# Altium PCB preamp.PcbDoc
Units mm, origin at the board's own origin, x right, y up, seen from the top; angles counter-clockwise.
Board outline 150 x 50 mm, 2 copper layers (Top Layer, Bottom Layer); 61 components, 33 nets, 167 pads, 2 vias.
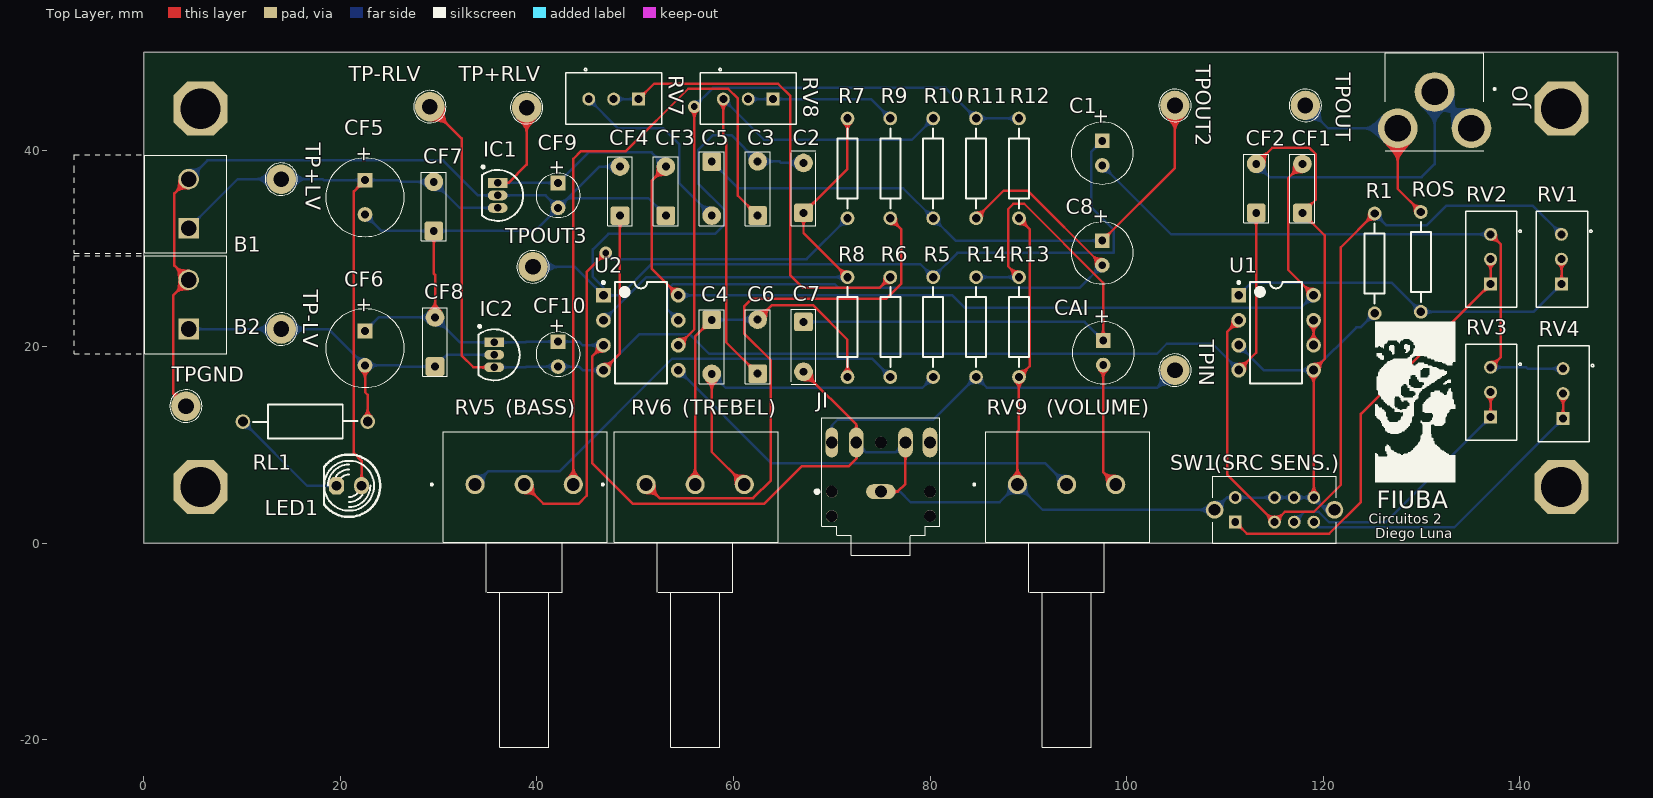
[diagram p0: Top Layer view]
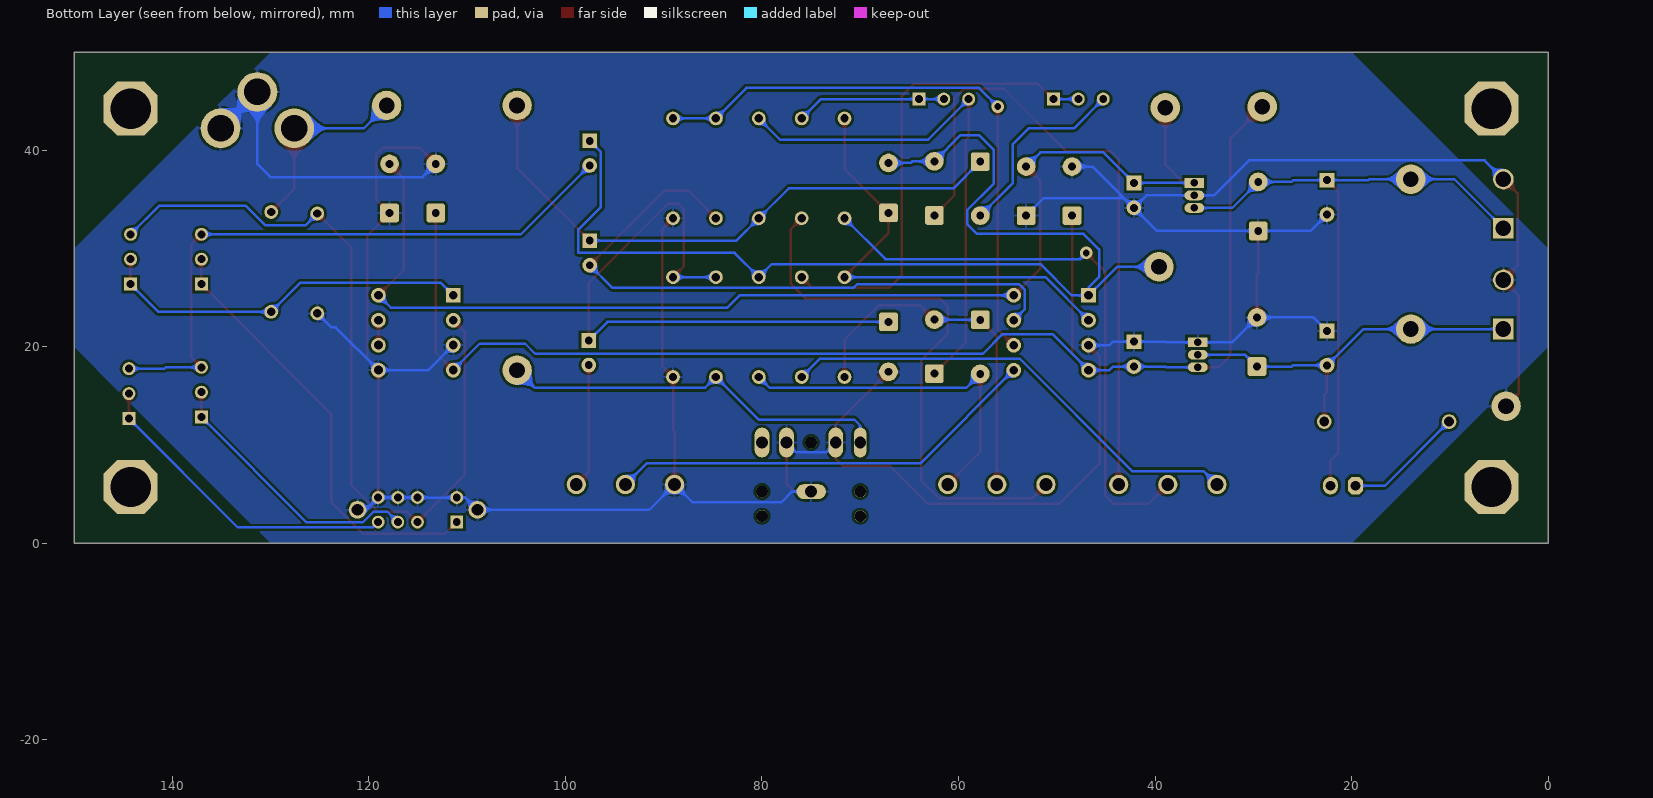
[diagram p1: Bottom Layer view, seen from below]
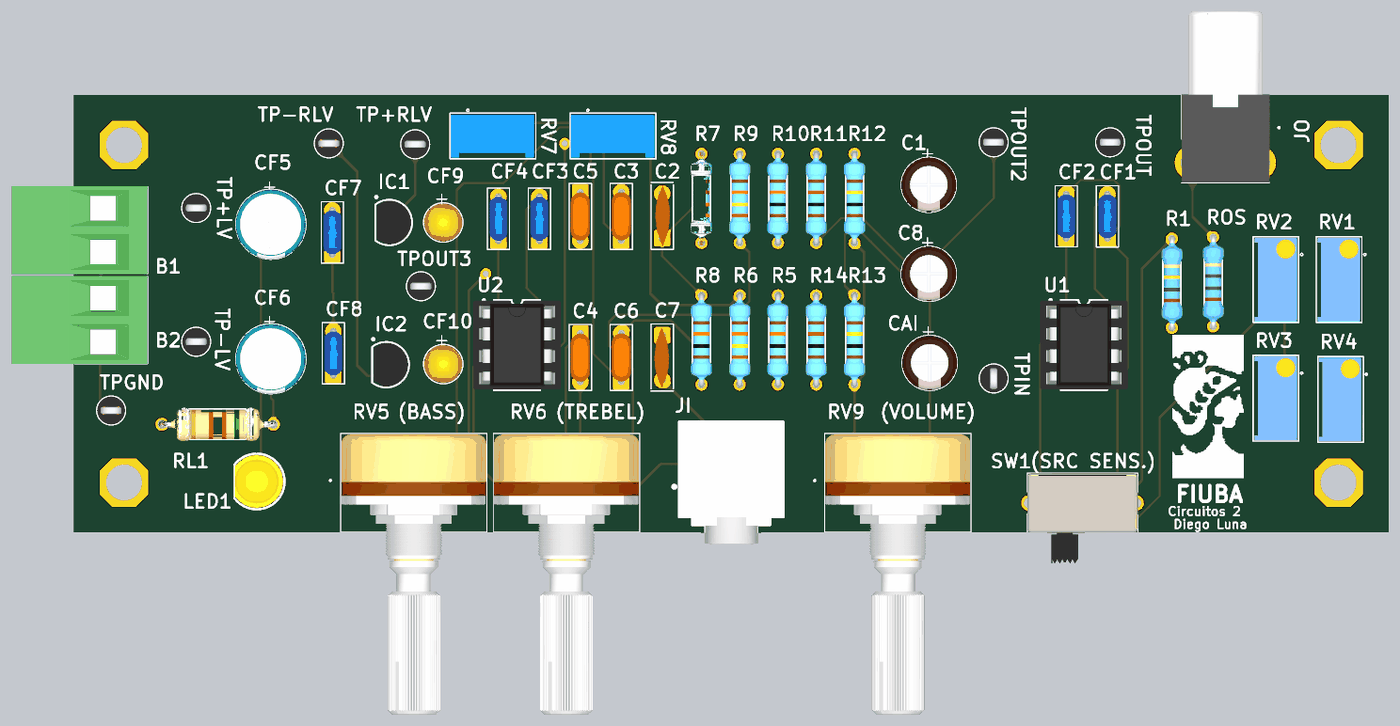
[diagram p2: 3D render of the assembled board from above, using the file's embedded part models]

## Layer stack, top to bottom
Top Solder: solder mask 0.0102, Solder Resist, Dk 3.5
Top Layer: signal copper 0.0356
Dielectric 1: dielectric 0.32, FR-4, Dk 4.8
Bottom Layer: signal copper 0.0356
Bottom Solder: solder mask 0.0102, Solder Resist, Dk 3.5

## Board outline
0,0 150,0 150,50 0,50

## Design rules (kind name [scope] priority, off if disabled: settings)
Clearance [All] p1: gap=0.254 ignorepadtopadclearanceinfootprint=FALSE except(0: Arc-Hole Track-Hole SMDPad-Hole THPad-Hole Via-Hole Fill-Hole Poly-Hole Region-Hole Text-Hole)
HoleSize HoleSize_Exceptions [InComponent('JO') OR IsOctagonalPad] p1: absolutevalues=TRUE maxlimit=5 minlimit=0.025 maxpercent=80.000 minpercent=20.000
HoleSize [All] p2: absolutevalues=TRUE maxlimit=2.54 minlimit=0.025 maxpercent=80.000 minpercent=20.000
MinimumSolderMaskSliver MinimumSolderMaskSliver_Exceptions [HasFootprint('TO-92-1') OR HasFootprint('TO-225')] p1: minsoldermaskwidth=0.06
MinimumSolderMaskSliver [All] p2: minsoldermaskwidth=0.254
PolygonConnect [All] p1: connectstyle=Relief reliefconductorwidth=0.254 reliefentries=4 polygonreliefangle="90 Angle" airgapwidth=0.254
RoomDefinition preamp [InComponentClass('preamp')] p1: confinementstyle=ConfineIn formatcopy=TRUE lockcomponents=FALSE outline -7.25,-21 149.925,-21 149.925,60.85 -7.25,60.85
RoutingVias [All] p1: holewidth=0.711 width=1.27 viastyle="Through Hole" minholewidth=0.711 minwidth=1.27 maxholewidth=0.711 maxwidth=1.27
SilkToSilkClearance SilkToSilkClearance_Exceptions [OnTopSilkscreen AND IsArc vs OnTopSilkscreen AND IsText AND (StringText = '+')] p1: silktosilkclearance=0.1
SilkToSilkClearance [All] p2: silktosilkclearance=0.254
SilkToSolderMaskClearance SilkToSolderMaskClearance_Exceptions3 [(IsTrack And OnTopSilkscreen) OR (IsPad And OnCopper) vs (IsTrack And OnTopSilkscreen) OR (IsPad And OnCopper)] p1: minsilkscreentomaskgap=0 clearancetoexposedcopper=TRUE
SilkToSolderMaskClearance SilkToSolderMaskClearance_Exceptions2 [HasFootprint('LED_5MM_GREEN') OR HasFootprint('LED_5MM_YELLOW') OR HasFootprint('Tantalum Electrolytic 4.5mmx8.0mmx0.254mm-CLEAN') OR HasFootprint('Cer. pitch 5.0mm height 5.5mm') OR HasFootprint('Cer. pitch 5.08mm height 6.00mm') OR HasFootprint('Cer. pitch 5.0mm height 6.6mm') vs HasFootprint('LED_5MM_GREEN') OR HasFootprint('LED_5MM_YELLOW') OR HasFootprint('Tantalum Electrolytic 4.5mmx8.0mmx0.254mm-CLEAN') OR HasFootprint('Cer. pitch 5.0mm height 5.5mm') OR HasFootprint('Cer. pitch 5.08mm height 6.00mm') OR HasFootprint('Cer. pitch 5.0mm height 6.6mm')] p2: minsilkscreentomaskgap=0 clearancetoexposedcopper=TRUE
SilkToSolderMaskClearance SilkToSolderMaskClearance_Exceptions [HasFootprint('TP-THT-MULTI') vs HasFootprint('TP-THT-MULTI')] p3: minsilkscreentomaskgap=0.08 clearancetoexposedcopper=TRUE
SilkToSolderMaskClearance [IsPad] p4: minsilkscreentomaskgap=0.254 clearancetoexposedcopper=TRUE
SolderMaskExpansion [All] p1: expansion=0.102
Width [All] p1: maxlimit=0.254 minlimit=0.254 preferedwidth=0.254
26 further rules are at their usual default settings.

## Components (designator, comment, footprint, x,y, rotation, side; value= is the part's Value field where it differs from the comment)
B1 "C-282822-2-C" TE-C-282822-2-C-PLUGGED 4.55,34.575 r90 top
B2 "C-282822-2-C" TE-C-282822-2-C-PLUGGED 4.55,24.32 r90 top
C1 "Al. Elect. 47u 35V 20% 105º" "Al. Electrolytic 6.3mmx11.0mmx2.5mm-CLEAN" 97.525,39.725 r270 top value=47µ
C2 "Cer. 15p 50V 10%" "Cer. pitch 5.08mm height 6.00mm" 67.125,36.183 r90 top value=15p
C3 "Cer. 4.7n 50V 10%" "Cer. pitch 5.5mm height 6.0mm" 62.456,36.133 r90 top value=4.7n
C4 "Cer. 47n 50V 10%" "Cer. pitch 5.5mm height 6.0mm" 57.787,20.006 r270 top value=47n
C5 "Cer. 4.7n 50V 10%" "Cer. pitch 5.5mm height 6.0mm" 57.787,36.108 r270 top value=4.7n
C6 "Cer. 47n 50V 10%" "Cer. pitch 5.5mm height 6.0mm" 62.456,20.031 r90 top value=47n
C7 "Cer. 100p 50V 10%" "Cer. pitch 5.08mm height 6.00mm" 67.125,20.009 r270 top value=100p
C8 "Al. Elect. 47u 35V 20% 105º" "Al. Electrolytic 6.3mmx11.0mmx2.5mm-CLEAN" 97.525,29.565 r270 top value=47µ
CAI "Al. Elect. 47u 35V 20% 105º" "Al. Electrolytic 6.3mmx11.0mmx2.5mm-CLEAN" 97.625,19.405 r270 top value=47µ
CF1 "Cer. 100n 50V 10%" "Cer. pitch 5.0mm height 5.5mm" 117.9,36.125 r90 top value=100n
CF2 "Cer. 100n 50V 10%" "Cer. pitch 5.0mm height 5.5mm" 113.2,36.133 r90 top value=100n
CF3 "Cer. 100n 50V 10%" "Cer. pitch 5.0mm height 5.5mm" 53.119,35.858 r90 top value=100n
CF4 "Cer. 100n 50V 10%" "Cer. pitch 5.0mm height 5.5mm" 48.45,35.858 r90 top value=100n
CF5 "Al. Elect. 220u 35V 20% 105º" "Al. Electrolytic 8.0mmx13.0mmx3.5mm-CLEAN" 22.5,35.225 r270 top value=220µ
CF6 "Al. Elect. 220u 35V 20% 105º" "Al. Electrolytic 8.0mmx13.0mmx3.5mm-CLEAN" 22.5,19.875 r270 top value=220µ
CF7 "Cer. 100n 50V 10%" "Cer. pitch 5.0mm height 5.5mm" 29.5,34.3 r90 top value=100n
CF8 "Cer. 100n 50V 10%" "Cer. pitch 5.0mm height 5.5mm" 29.625,20.5 r90 top value=100n
CF9 "Tant. Elect. 1u 25V 10%" "Tantalum Electrolytic 4.5mmx8.0mmx0.254mm-CLEAN" 42.15,35.425 r270 top value=1µ
CF10 "Tant. Elect. 1u 25V 10%" "Tantalum Electrolytic 4.5mmx8.0mmx0.254mm-CLEAN" 42.15,19.27 r270 top value=1µ
IC1 "LM78L05" TO-92-1 36,35.425 r180 top
IC2 "LM79L05" TO-92-1 35.65,19.2 r180 top
JI "SJ1-3525NG" *CUI_SJ1-3525NG 75,5.275 r90 top
JO "PJRAN1X1U01X" *SWITCHCRAFT_PJRAN1X1U01X 131.35,45.95 r180 top
LED1 "LED (YELLOW)" LED_5MM_YELLOW 20.88,5.875 r180 top
R1 "Resistor 100K 1/4W 5%" AXIAL-0.4-E24-0_25W-100k 125.25,28.5 r90 top value=100K
R5 "Resistor 10K 1/4W 1%" AXIAL-0.4-E24-0_25W-10k-1% 80.325,22.021 r90 top value=10K
R6 "Resistor 24K 1/4W 1%" AXIAL-0.4-E24-0_25W-24k-1% 75.962,22.021 r90 top value=24K
R7 "Resistor 3.3k 1/4W 1%" AXIAL-0.4-E24-0_25W-3.3k-1% 71.6,38.176 r90 top value=3.3k
R8 "Resistor 10K 1/4W 1%" AXIAL-0.4-E24-0_25W-10k-1% 71.6,22.021 r90 top value=10K
R9 "Resistor 24K 1/4W 1%" AXIAL-0.4-E24-0_25W-24k-1% 75.962,38.176 r90 top value=24K
R10 "Resistor 10K 1/4W 1%" AXIAL-0.4-E24-0_25W-10k-1% 80.325,38.176 r90 top value=10K
R11 "Resistor 1K 1/4W 1%" AXIAL-0.4-E24-0_25W-1k-1% 84.687,38.176 r90 top value=1K
R12 "Resistor 100K 1/4W 1%" AXIAL-0.4-E24-0_25W-100k-1% 89.05,38.176 r90 top value=100K
R13 "Resistor 100K 1/4W 1%" AXIAL-0.4-E24-0_25W-100k-1% 89.05,22.021 r90 top value=100K
R14 "Resistor 1K 1/4W 1%" AXIAL-0.4-E24-0_25W-1k-1% 84.687,22.021 r90 top value=1K
RL1 "Resistor 5.6K 1/2W 5%" AXIAL-0.5-E24-0_5W-5.6K 16.425,12.4 r180 top value=5.6K
ROS "Resistor 10 1/4W 5%" AXIAL-0.4-E24-0_25W-10 129.95,28.65 r90 top value=10
RV1 "RES_TRIMMER_25K_25T_VERTICAL" POT_3296W 144.25,28.9 r90 top
RV2 "RES_TRIMMER_5K_25T_VERTICAL" POT_3296W 137.05,28.9 r90 top value=5k
RV3 "RES_TRIMMER_20K_25T_VERTICAL" POT_3296W 137.05,15.365 r90 top value=20k
RV4 "RES_TRIMMER_2K_25T_VERTICAL" POT_3296W 144.425,15.225 r90 top value=2k
RV5 "RPot_PCB_25K_LIN" POTE16mm 38.7,5.975 r0 top value=25k
RV6 "RPot_PCB_25K_LIN" POTE16mm 56.1,5.975 r0 top value=25k
RV7 "RES_TRIMMER_2K_1T_VERTICAL" POT_3386W 47.835,45.225 r180 top value=2k
RV8 "RES_TRIMMER_2K_1T_VERTICAL" POT_3386W 61.525,45.225 r180 top value=2k
RV9 "RPot_PCB_500K_LOG" POTE16mm 93.9,5.975 r0 top value=500k
SW1 "SWITCH SLIDE DP3T 200MA 30V" E-SWITCH_EG2315 111.06,2.175 r0 top
TP+LV "TESTPOINT_THT" TP-THT-MULTI 13.975,37.075 r90 top
TP+RLV "TESTPOINT_THT" TP-THT-MULTI 38.95,44.35 r90 top
TP-LV "TESTPOINT_THT" TP-THT-MULTI 13.975,21.82 r90 top
TP-RLV "TESTPOINT_THT" TP-THT-MULTI 29.1,44.45 r90 top
TPGND "TESTPOINT_THT" TP-THT-MULTI 4.275,13.975 r90 top
TPIN "TESTPOINT_THT" TP-THT-MULTI 104.925,17.632 r0 top
TPOUT "TESTPOINT_THT" TP-THT-MULTI 118.2,44.575 r90 top
TPOUT2 "TESTPOINT_THT" TP-THT-MULTI 104.925,44.575 r90 top
TPOUT3 "TESTPOINT_THT" TP-THT-MULTI 39.6,28.15 r90 top
U1 "NE5532" "DIP8 - W SOCKET" 115.225,21.45 r0 top
U2 "NE5532" "DIP8 - W SOCKET" 50.575,21.442 r0 top
? "Comment" "FIUBA LOGO - SMALL2" 129,13.475 r0 top

## Footprints (in the part's own frame and the unit in brackets; to place one, negate y for a bottom-side part, rotate by r counter-clockwise, add the part's x,y. Pads: shape width x height; smd on the part's side, far side on the other; paste and mask are expansions set on the pad)
*CUI_SJ1-3525NG [mm]
  oval 1.508x3.016 hole 1.2: 1(0,0)
  oval 3.016x1.508 hole 1.2: 2(5,-5) 4(5,-2.5) 5(5,2.5)
  oval 3.016x1.308 hole 1.2: 3(5,5)
  round 1.2 hole 1.2 unplated: None(-2.5,5) None(-2.5,-5) None(0,5) None(0,-5) None(5,0)
  silkscreen extent -6.5,-6 7.5,6.67, body extent -6.52,-6.03 7.53,5.97, height 5.5
*SWITCHCRAFT_PJRAN1X1U01X [mm]
  round 4.039 hole 2.693: 1(0,0) 2(-3.75,3.7) 3(3.75,3.7)
  silkscreen extent -6.21,-4 5,6, body extent -5.05,-13.56 5,5.94, height 13
"Al. Electrolytic 6.3mmx11.0mmx2.5mm-CLEAN" [mm] "Polarized capacitors, Aluminum Electrolytic Capacitors, 2-Leads, Body 6.3mmx11.0mmx2.5mm"
  rect 1.5x1.5 hole 0.8: 1(-1.25,0)
  round 1.5 hole 0.8: 2(1.25,0)
  silkscreen extent -3.15,-3.15 3.15,3.15, body extent -3.15,-3.15 3.15,3.15, height 10.9
"Al. Electrolytic 8.0mmx13.0mmx3.5mm-CLEAN" [mm] "Polarized capacitors, Aluminum Electrolytic Capacitors, 2-Leads, Body 8.0mmx13.0mmx3.5mm"
  rect 1.5x1.5 hole 0.8: 1(-1.75,0)
  round 1.5 hole 0.8: 2(1.75,0)
  silkscreen extent -4,-4 4,4, body extent -11.13,-11.84 11.93,12.34, height 17.08
AXIAL-0.4-E24-0_25W-1k-1% [mm] "Axial Device, Thru-Hole; 2 Leads; 0.4 in Pin Spacing"
  round 1.4 hole 0.85: 1(-5.08,0) 2(5.08,0)
  silkscreen extent -4.06,-1.02 4.06,1.02, body extent -5.38,-1.2 5.38,1.2, height 2.41
AXIAL-0.4-E24-0_25W-3.3k-1% [mm] "Axial Device, Thru-Hole; 2 Leads; 0.4 in Pin Spacing"
  round 1.4 hole 0.85: 1(-5.08,0) 2(5.08,0)
  silkscreen extent -4.06,-1.02 4.06,1.02, body extent -5.38,-1.2 5.38,1.2, height 2.41
AXIAL-0.4-E24-0_25W-10 [mm] "Axial Device, Thru-Hole; 2 Leads; 0.4 in Pin Spacing"
  round 1.4 hole 0.85: 1(-5.08,0) 2(5.08,0)
  silkscreen extent -4.06,-1.02 4.06,1.02, body extent -5.41,-1.23 5.35,1.17, height 2.41
AXIAL-0.4-E24-0_25W-10k-1% [mm] "Axial Device, Thru-Hole; 2 Leads; 0.4 in Pin Spacing"
  round 1.4 hole 0.85: 1(-5.08,0) 2(5.08,0)
  silkscreen extent -4.06,-1.02 4.06,1.02, body extent -5.38,-1.2 5.38,1.2, height 2.41
AXIAL-0.4-E24-0_25W-24k-1% [mm] "Axial Device, Thru-Hole; 2 Leads; 0.4 in Pin Spacing"
  round 1.4 hole 0.85: 1(-5.08,0) 2(5.08,0)
  silkscreen extent -4.06,-1.02 4.06,1.02, body extent -5.38,-1.2 5.38,1.2, height 2.41
AXIAL-0.4-E24-0_25W-100k [mm] "Axial Device, Thru-Hole; 2 Leads; 0.4 in Pin Spacing"
  round 1.4 hole 0.85: 1(-5.08,0) 2(5.08,0)
  silkscreen extent -4.06,-1.02 4.06,1.02, body extent -5.41,-1.23 5.35,1.17, height 2.41
AXIAL-0.4-E24-0_25W-100k-1% [mm] "Axial Device, Thru-Hole; 2 Leads; 0.4 in Pin Spacing"
  round 1.4 hole 0.85: 1(-5.08,0) 2(5.08,0)
  silkscreen extent -4.06,-1.02 4.06,1.02, body extent -5.38,-1.2 5.38,1.2, height 2.41
AXIAL-0.5-E24-0_5W-5.6K [mm] "Axial Device, Thru-Hole; 2 Leads; 0.5 in Pin Spacing"
  round 1.5 hole 1: 1(-6.35,0) 2(6.35,0)
  silkscreen extent -5.33,-1.73 5.33,1.73, body extent -6.73,-1.87 6.73,1.87, height 4.3
"Cer. pitch 5.0mm height 5.5mm" [mm] "Radial ceramic capacitor pitch 5.0mm height 5.5mm"
  round 0.508 on Mech15: 0(0,0)
  rrect25% 1.905x1.905 hole 0.8: 1(-2.5,0)
  round 1.905 hole 0.8: 2(2.5,0)
  silkscreen extent -3.5,-1.27 3.5,1.27, body extent -2.8,-1 2.8,1, height 5.47
"Cer. pitch 5.5mm height 6.0mm" [mm] "Radial ceramic capacitor pitch 5.5mm height 5.0mm"
  round 0.508 on Mech15: 0(0,0)
  rrect25% 1.905x1.905 hole 0.8: 1(-2.75,0)
  round 1.905 hole 0.8: 2(2.75,0)
  silkscreen extent -3.77,-1.27 3.75,1.27, body extent -2.95,-1.1 2.95,1.1, height 5.74
"Cer. pitch 5.08mm height 6.00mm" [mm] "Radial ceramic capacitor pitch 5.08mm height 6.0mm"
  round 0.508 on Mech15: 0(0,0)
  rrect25% 1.905x1.905 hole 0.8: 1(-2.54,0)
  round 1.905 hole 0.8: 2(2.54,0)
  silkscreen extent -3.82,-1.27 3.81,1.27, body extent -3.53,-0.9 3.47,0.8, height 7.5
"DIP8 - W SOCKET" [mm] "DIP, 8-Pin, Row Spacing 7.62 mm, Pitch 2.54 mm"
  rect 1.5x1.5 hole 0.9: 1(-3.81,3.81)
  round 1.5 hole 0.9: 2(-3.81,1.27) 3(-3.81,-1.27) 4(-3.81,-3.81) 5(3.81,-3.81) 6(3.81,-1.27) 7(3.81,1.27) 8(3.81,3.81)
  silkscreen extent -3.93,-5.15 2.65,5.23, body extent -5,-5.06 5,5.06, height 7.66
E-SWITCH_EG2315 [mm] "EG Series DP3T On-On-On 0.2 A Right Angle Through Hole Slide Switch"
  rect 1.3x1.3 hole 0.8: 1(0,0)
  round 1.3 hole 0.8: 2(4,0) 3(6,0) 4(8,0) 5(0,2.5) 6(4,2.5) 7(6,2.5) 8(8,2.5)
  round 1.8 hole 1.2: MH1(-2.1,1.25) MH2(10.1,1.25)
  silkscreen extent -2.3,-2.15 10.3,4.65, body extent -2.31,-5.66 10.3,4.67, height 4.69
"FIUBA LOGO - SMALL2" [mm] "FIUBA LOGO"
  silkscreen extent -3.67,-7.19 4.43,9.1
LED_5MM_YELLOW [mil] "LED 5mm YELLOW"
  oval 60x70 hole 39.37: A(-50,0)
  oct 60x70 hole 39.37: K(50,0)
  silkscreen extent -125,-125 100,125, body extent -118,-118 98,118, height 352
POT_3296W [mil] "3296 - 3/8 ” Square Trimpot® Trimming Potentiometer"
  round 52 / inner round 60 / far side round 52 hole 32: 1(101,0) 2(1,0)
  rect 52x52 / inner round 60 / far side rect 52x52 hole 32: 3(-99,0)
  silkscreen extent -192,-123 193,100, body extent -188,-96 187,94, height 454
POT_3386W [mil] "3386 - 3/8 ” Square Trimpot® Trimming Potentiometer"
  round 52 / inner round 60 / far side round 52 hole 32: 1(101,0) 2(1,0)
  rect 52x52 / inner round 60 / far side rect 52x52 hole 32: 3(-99,0)
  silkscreen extent -192,-123 193,100, body extent -184,-97 191,93, height 375
POTE16mm [mm]
  round 1.95 hole 1.3: 1(-5,0.025) 2(0,0.025) 3(5,0.025)
  silkscreen extent -9.5,-26.73 8.45,5.37, body extent -8.15,-26.65 8.35,5.25, height 20.25
"Tantalum Electrolytic 4.5mmx8.0mmx0.254mm-CLEAN" [mm] "Polarized capacitors, Tantalum Electrolytic Capacitors, 2-Leads, Body 4.5mmx8.0mmx0.254mm"
  rect 1.5x1.5 hole 0.8: 1(-1.27,0)
  round 1.5 hole 0.8: 2(1.27,0)
  silkscreen extent -2.25,-2.25 2.25,2.25, body extent -2.17,-2.17 2.17,2.17, height 8.5
TE-C-282822-2-C-PLUGGED [mm] "5.00mm - Open Vertical PCB Header - 02p"
  rect 2.1x2.1 hole 1.6: 1(-2.5,0)
  round 2.1 hole 1.6: 2(2.5,0)
  silkscreen extent -5.03,-3.9 4.98,11.65, body extent -5.03,-3.87 4.98,11.63, height 18.43
TO-92-1 [mm] "TO, Flat Index; 3 In-Line, Axial Leads; Body Dia. 5mm; Leads 0.55 x 0.50 mm (max)"
  rect 2x1 hole 0.75: 1(0,-1.27)
  oval 2x1 hole 0.75: 2(0,0) 3(0,1.27)
  silkscreen extent -2.6,-3.02 1.6,2.6, body extent -2.49,-2.51 1.38,2.48, height 6.47
TP-THT-MULTI [mm] "Thru-hole test point loop"
  round 3 hole 1.6: 1(0,0)
  silkscreen extent -1.65,-1.65 1.65,1.65, body extent -1.6,-1.6 1.6,1.59, height 8.09

## Part data
B1 B2: "TERMI-BLOK HEADER,ASSY90 2P - serie 282822 - 5.00mm", Manufacturer="TE Connectivity", ComponentLink1 Description=Manufacturer, ComponentLink1URL=http://www.te.com/usa-en/home.html, ComponentLink2 Description=Datasheet, ComponentLink2URL=http://www.te.com/usa-en/product-282822-2.html, Created Date="6 MArch 2017", NoPins=02, partNo=C-282822-2-C
C1 C8 CAI: "Aluminum Electrolytic Capacitor 47µF 35V 20% 105º", Temperature=105ºC, Tolerance=20%, Voltage=35V, Application="Medium and high voltage type range from 160V-450V used as primary side input filter in power supply, which can be used in general switching power supply, PC power supply and industrial computer power supply,server power supply, AC-DC converter, motor drive circuit DC storage filter, digital audio, digital TV, communication base station, DC-AC inverter, inverter power supply and converters etc", Characteristics="Aluminum Electrolytic Capacitor"
C2: "Ceramic Capacitor 15pF 50V 10%", Tolerance=10%, Voltage=50V, Application="Medium and high voltage type range from 160V-450V used as primary side input filter in power supply, which can be used in general switching power supply, PC power supply and industrial computer power supply,server power supply, AC-DC converter, motor drive circuit DC storage filter, digital audio, digital TV, communication base station, DC-AC inverter, inverter power supply and converters etc", Characteristics="Ceramic Capacitor"
C3 C5: "Ceramic Capacitor 4.7nF 50V 10%", Tolerance=10%, Voltage=50V, Application="Medium and high voltage type range from 160V-450V used as primary side input filter in power supply, which can be used in general switching power supply, PC power supply and industrial computer power supply,server power supply, AC-DC converter, motor drive circuit DC storage filter, digital audio, digital TV, communication base station, DC-AC inverter, inverter power supply and converters etc", Characteristics="Ceramic Capacitor"
C4 C6: "Ceramic Capacitor 47nF 50V 10%", Tolerance=10%, Voltage=50V, Application="Medium and high voltage type range from 160V-450V used as primary side input filter in power supply, which can be used in general switching power supply, PC power supply and industrial computer power supply,server power supply, AC-DC converter, motor drive circuit DC storage filter, digital audio, digital TV, communication base station, DC-AC inverter, inverter power supply and converters etc", Characteristics="Ceramic Capacitor"
C7: "Ceramic Capacitor 100pF 50V 10%", Tolerance=10%, Voltage=50V, Application="Medium and high voltage type range from 160V-450V used as primary side input filter in power supply, which can be used in general switching power supply, PC power supply and industrial computer power supply,server power supply, AC-DC converter, motor drive circuit DC storage filter, digital audio, digital TV, communication base station, DC-AC inverter, inverter power supply and converters etc", Characteristics="Ceramic Capacitor"
CF1 CF2 CF3 CF4 CF7 CF8: "Ceramic Capacitor 100nF 50V 10%", Tolerance=10%, Voltage=50V, Application="Medium and high voltage type range from 160V-450V used as primary side input filter in power supply, which can be used in general switching power supply, PC power supply and industrial computer power supply,server power supply, AC-DC converter, motor drive circuit DC storage filter, digital audio, digital TV, communication base station, DC-AC inverter, inverter power supply and converters etc", Characteristics="Ceramic Capacitor"
CF5 CF6: "Aluminum Electrolytic Capacitor 220µF 35V 20% 105º", Temperature=105ºC, Tolerance=20%, Voltage=35V, Application="Medium and high voltage type range from 160V-450V used as primary side input filter in power supply, which can be used in general switching power supply, PC power supply and industrial computer power supply,server power supply, AC-DC converter, motor drive circuit DC storage filter, digital audio, digital TV, communication base station, DC-AC inverter, inverter power supply and converters etc", Characteristics="Aluminum Electrolytic Capacitor"
CF9 CF10: "Tantalum Electrolytic Capacitor 1µF 25V 10%", Tolerance=10%, Voltage=25V, Application="Medium and high voltage type range from 160V-450V used as primary side input filter in power supply, which can be used in general switching power supply, PC power supply and industrial computer power supply,server power supply, AC-DC converter, motor drive circuit DC storage filter, digital audio, digital TV, communication base station, DC-AC inverter, inverter power supply and converters etc", Characteristics="Tantalum Electrolytic Capacitor"
IC1: "5V fixed regulator - 100mA", Manufacturer_Part_Number=LM7805, Height=4.7mm
IC2: "-5V fixed regulator - 100mA", Manufacturer_Part_Number=LM7805, Height=4.7mm
JO: "Conn Phono Jack F 3 POS Solder RA Thru-Hole 3 Terminal 1 Port", Package=None, Availability=Unavailable, MF=Switchcraft, MP=PJRAN1X1U01X, Price=None, SnapEDA_Link=https://www.snapeda.com/parts/PJRAN1X1U01X/Switchcraft%20Inc./view-part/?ref=snap
LED1: "Typical LED (YELLOW)", Publisher="Altium Limited"
R1: "Resistor 100KO 1/4W 5%", Power=1/4W, Tolerance=5%, Type="(TH) Metal film"
R5 R8 R10: "Resistor 10KO 1/4W 1%", Power=1/4W, Tolerance=1%, Type="(TH) Metal film"
R6 R9: "Resistor 24KO 1/4W 1%", Power=1/4W, Tolerance=1%, Type="(TH) Metal film"
R7: "Resistor 3.3kO 1/4W 1%", Power=1/4W, Tolerance=1%, Type="(TH) Metal film"
R11 R14: "Resistor 1KO 1/4W 1%", Power=1/4W, Tolerance=1%, Type="(TH) Metal film"
R12 R13: "Resistor 100KO 1/4W 1%", Power=1/4W, Tolerance=1%, Type="(TH) Metal film"
RL1: "Resistor 5.6KO 1/2W 5%", Power=1/2W, Tolerance=5%, Type="(TH) Metal film"
ROS: "Resistor 10O 1/4W 5%", Power=1/4W, Tolerance=5%, Type="(TH) Metal film"
RV1: "Trimmer Vertical 25K 500mW 25-turn", Power=25k, Ratings="1/2W; ±100ppm/°C", Tolerance=±10%, Material=Cermet
RV2: "Trimmer Vertical 5K 500mW 25-turn", Ratings="1/2W; ±100ppm/°C", Tolerance=±10%, Material=Cermet
RV3: "Trimmer Vertical 20K 500mW 25-turn", Ratings="1/2W; ±100ppm/°C", Tolerance=±10%, Material=Cermet
RV4: "Trimmer Vertical 2K 500mW 25-turn", Ratings="1/2W; ±100ppm/°C", Tolerance=±10%, Material=Cermet
RV5 RV6: "25K PCB LIN Potentiometer"
RV7 RV8: "Trimmer Vertical 2K 500mW 1-turn", Ratings="1/2W; ±100ppm/°C", Tolerance=±10%, Material=Cermet
RV9: "500K PCB LOG Potentiometer"
SW1: library part E-SWITCH_EG2315E, "EG Series DP3T On-On-On 0.2 A Right Angle Through Hole Slide Switch", contact_current_rating=0.2A, contact_resistance=20mO, mfg_package_ident=EG2315, mfg_package_ident_date=0, Package=PTH_SW_12MM6_6MM8, temperature_range_high=+70°C, temperature_range_low=-20°C, voltage_rating_DC=30V, centroid_not_specified=No, datasheet=https://www.e-switch.com/system/asset/product_line/data_sheet/119/EG.pdf, device_class_L1=Electromechanical, device_class_L2=Switches, device_class_L3="Slide Switches", DeviceName=E-SWITCH_EG2315_0_0, DeviceSetName=E-SWITCH_EG2315, digikey_description="SWITCH SLIDE DP3T 200MA 30V", digikey_part_number=EG1913-ND, footprint_url=http://spec_sheets.e-switch.com/specs/P040240.pdf, GateName_1=G$0, Height=5.1mm, lead_free=yes, LibraryName="Upverter Library", MF=E-Switch, mfg_package_ident_rev=0, mouser_description="Slide Switches SIDE OP PC MNT DP3T", mouser_part_number=612-EG2315, MPN=EG2315, prefix=SW, rohs=yes, SymbolName_1=E-SWITCH_EG2315_0_0, throw_configuration=DP3T, verification_version=0.0.0.1
TP+LV TP+RLV TP-LV TP-RLV TPGND TPIN TPOUT TPOUT2 TPOUT3: "Test Point PCB mount Multi-purpose Black", Manufacturer 1="Keystone Electronics", Manufacturer Part Number 1=5014, PBL Part Number=3100-xxx, Supplier Part Number 1=5014K-ND, Description 1="TEST POINT PC MULTI PURPOSE YEL", Material="Base, Nylon 46, UL 94V-0", Mounting Type="0.063\" (1.600mm) Hole Diameter", Supplier 1=Digi-Key
U1 U2: "Dual Low-Noise Operational Amplifiers", Manufacturer="Texas Instruments", PowerWise=N, Code_JEDEC=MS-001-BA, ComponentLink1Description="Manufacturer URL", ComponentLink1URL=http://www.ti.com/, ComponentLink2Description="NE5532 Datasheet", ComponentLink2URL=http://www.ti.com/lit/gpn/ne5532, ComponentLink3Description="NE5532 Web Page", ComponentLink3URL=http://www.ti.com/product/NE5532?keyMatch=NE5532&tisearch=Search-EN-Everything, ComponentLink4Description="NE5532 Package Page", ComponentLink4URL=http://www.ti.com/product/NE5532/pinout-quality, CompType=Amplifiers, PackageDescription="MDIP, .365 x .250 x .130in, 8 Lead, .100in Pitch", PackageReference=N08E, PartNumber=NE5532, PinCount=8, rohs=N

## Free pads (board coordinates)
  oct 5.5x5.5 hole 4.1: -(5.75,5.75) -(5.75,44.25) -(144.25,5.75) -(144.25,44.25)

## Via types
v1: diameter 1.27, hole 0.711, Top Layer to Bottom Layer, 2 vias

## Nets (pads, with @x,y where several pads share a name; then routed paths per layer and width w, separated by ;. In a path a pad name is that pad's centre, name@x,y a point inside that pad or via, vN(x,y) a via of type N, cw(c..) or ccw(c..) an arc to the next point about the centre after c; other vN are vias at no path point)
+LV: B1.1 CF5.1 CF7.2 IC1.3 LED1.A TP+LV.1 | length 66.6
  Top Layer w0.254: LED1.A 22.15,8.406 21.361,9.195 21.361,35.836 CF5.1
  Bottom Layer w0.254: B1.1 9.55,37.075 TP+LV.1 18.186,37.075 18.286,36.975 CF5.1 25.908,36.975 26.083,36.8 CF7.2 32.145,34.155 IC1.3
+RLV: CF1.2 CF3.2 CF9.1 IC1.1 TP+RLV.1 U1.8 U2.8 | length 124.1
  Top Layer w0.254: IC1.1 37.084,36.695 38.95,38.561 TP+RLV.1 ; CF3.2 51.664,36.903 51.664,27.973 U2.8 ; CF1.2 116.459,37.184 116.459,27.836 U1.8
  Bottom Layer w0.254: IC1.1 CF9.1 45.257,39.802 51.675,39.802 CF3.2 ; U2.8 82.271,25.252 83.52,24.003 117.778,24.003 U1.8
-LV: B2.1 CF6.2 CF8.1 IC2.2 RL1.1 TP-LV.1 | length 39
  Top Layer w0.254: CF6.2 22.5,15.388 22.775,15.113 RL1.1
  Bottom Layer w0.254: B2.1 TP-LV.1 18.805,21.82 CF6.2 25.984,18.125 26.109,18 CF8.1 30.825,19.2 IC2.2
-RLV: CF2.1 CF4.1 CF10.2 IC2.3 TP-RLV.1 U1.4 U2.4 | length 143.5
  Top Layer w0.254: TP-RLV.1 32.337,41.213 32.337,19.121 33.528,17.93 IC2.3 ; U2.4 48.45,19.317 CF4.1 ; U1.4 113.2,19.425 CF2.1
  Bottom Layer w0.254: IC2.3 38.862,17.93 38.932,18 CF10.2 44.272,18 44.64,17.632 U2.4 50.436,21.303 55.516,21.303 57.509,19.31 103.079,19.31 104.089,20.32 108.735,20.32 U1.4
GND: B1.2 B2.2 C7.2 CF1.1 CF2.2 CF3.1 CF4.2 CF5.2 CF6.1 CF7.1 CF8.2 CF9.2 CF10.1 IC1.2 IC2.1 JI.1 JI.4 JI.5 JO.1 JO.2 R1.1 R12.1 R13.1 RV9.1 SW1.5 SW1.6 SW1.7 SW1.8 SW1.MH1 SW1.MH2 TPGND.1 U1.3 U1.5 U2.3 | length 378.3
  Top Layer w0.254: TPGND.1 2.997,15.253 2.997,25.267 B2.2 3.099,28.271 3.099,35.624 B1.2 ; CF7.1 29.5,27.455 29.625,27.33 CF8.2 ; U2.3 45.618,19.025 45.618,8.179 49.733,4.064 63.144,4.064 66.954,7.874 71.738,7.874 72.5,8.636 JI.5 72.5,12.094 C7.2 ; JI.1 76.708,5.275 77.5,6.067 JI.4 ; RV9.1 88.9,11.379 89.05,11.529 R13.1 90.145,18.035 90.145,32.001 R12.1 ; CF2.2 114.826,40.259 118.618,40.259 119.253,39.624 119.253,34.978 CF1.1 120.167,31.358 120.167,18.772 U1.5 119.035,11.15 119.06,11.125 SW1.8
  Bottom Layer w0.254: B1.2 6.464,38.989 30.455,38.989 34.019,35.425 IC1.2 40.88,35.425 CF9.2 ; CF6.1 23.875,23 CF8.2 32.155,20.47 IC2.1 38.862,20.47 38.932,20.54 CF10.1 44.272,20.54 44.64,20.172 U2.3 ; CF5.2 24.175,31.8 CF7.1 39.795,31.8 CF9.2 ; CF4.2 46.353,38.358 43.149,35.154 ; CF3.1 51.323,35.154 43.149,35.154 ; JI.5 73.504,9.271 76.496,9.271 JI.4 ; JI.1 76.937,5.275 78.021,4.191 87.091,4.191 RV9.1 91.475,3.425 SW1.MH1 110.21,4.675 SW1.5 SW1.6 SW1.7 SW1.8 120.31,3.425 SW1.MH2 ; U1.3 113.955,17.64 U1.5 123.391,21.996 123.826,21.996 R1.1 ; CF2.2 114.546,37.287 130.023,37.287 131.35,38.615 JO.1 135.05,42.25 JO.2 ; CF9.2 43.149,35.154
NetC1_1: C1.1 C2.2 C3.2 R5.2 TPOUT3.1 U2.1 | length 116.8
  Bottom Layer w0.254: TPOUT3.1 43.867,28.15 U2.1 ; C2.2 64.854,38.723 64.694,38.883 C3.2 59.785,41.554 57.912,41.554 56.439,40.081 56.439,36.601 59.131,33.909 59.131,32.512 58.115,31.496 47.271,31.496 45.7,29.925 45.7,27.123 46.765,26.058 U2.1 ; C1.1 96.393,39.843 96.393,34.239 98.679,31.953 98.679,29.566 82.79,29.566 R5.2 79.003,28.423 51.65,28.423 48.48,25.252 U2.1
NetC1_2: C1.2 RV2.1 RV3.1 RV4.1 | length 64.3
  Top Layer w0.254: RV3.1 138.1,18.98 138.1,30.415 RV2.1
  Bottom Layer w0.254: C1.2 104.535,31.465 RV2.1 ; RV3.1 140.665,17.93 140.805,17.79 RV4.1
NetC2_1: C2.1 R7.2 R8.2 U2.2 | length 46.5
  Top Layer w0.254: R8.2 67.125,31.576 C2.1 71.6,38.118 R7.2
  Bottom Layer w0.254: U2.2 51.154,27.101 R8.2
NetC3_1: C3.1 RV5.3 | length 66
  Top Layer w0.254: RV5.3 43.7,39.153 44.475,39.929 49.047,39.929 55.397,46.279 59.461,46.279 60.452,45.288 60.452,35.387 C3.1
NetC4_1: C4.1 C6.2 R8.1 RV6.2 | length 37.1
  Top Layer w0.254: RV6.2 56.1,21.068 C4.1 ; C6.2 63.933,24.257 68.072,24.257 71.6,20.729 R8.1
  Bottom Layer w0.254: C4.1 60.096,22.756 60.121,22.781 C6.2
NetC4_2: C4.2 R5.1 RV6.3 | length 36.2
  Top Layer w0.254: C4.2 57.787,9.313 RV6.3
  Bottom Layer w0.254: C4.2 59.194,15.85 79.234,15.85 R5.1
NetC5_1: C5.1 C8.1 R10.1 TPOUT2.1 | length 59.9
  Top Layer w0.254: C8.1 104.925,38.215 TPOUT2.1
  Bottom Layer w0.254: C5.1 60.501,36.144 77.277,36.144 R10.1 82.606,30.815 C8.1
NetC5_2: C5.2 RV7.1 | length 19.7
  Bottom Layer w0.254: RV7.1 48.255,42.24 52.857,42.24 54.458,40.64 54.458,36.688 C5.2
NetC6_1: C6.1 R10.2 RV8.1 | length 53.4
  Top Layer w0.254: RV8.1 58.96,41.351 59.258,41.053 59.258,20.479 C6.1
  Bottom Layer w0.254: RV8.1 63.098,41.087 78.156,41.087 R10.2
NetC7_1: C7.1 CAI.1 R13.2 R14.2 | length 62.1
  Top Layer w0.254: R13.2 87.96,28.191 87.96,34.036 88.494,34.569 89.586,34.569 97.625,26.53 CAI.1
  Bottom Layer w0.254: C7.1 95.732,22.549 CAI.1 ; R14.2 R13.2
NetC8_2: C8.2 R11.1 U2.7 | length 66.3
  Top Layer w0.254: R11.1 87.507,35.916 89.925,35.916 C8.2
  Bottom Layer w0.254: U2.7 53.238,23.859 53.238,25.781 53.848,26.391 70.307,26.391 70.688,26.01 95.219,26.01 C8.2
NetCAI_2: CAI.2 RV9.3 | length 12.7
  Top Layer w0.254: CAI.2 97.625,7.275 RV9.3
NetJI_3: JI.3 R14.1 TPIN.1 | length 39.9
  Bottom Layer w0.254: JI.3 70,11.984 70.612,12.596 80.343,12.596 R14.1 85.779,15.85 103.143,15.85 TPIN.1
NetJO_3: JO.3 ROS.2 TPOUT.1 | length 19.9
  Top Layer w0.254: JO.3 127.6,36.08 ROS.2
  Bottom Layer w0.254: TPOUT.1 120.525,42.25 JO.3
NetLED1_K: LED1.K RL1.2 | length 12.2
  Bottom Layer w0.254: RL1.2 16.6,5.875 LED1.K
NetR1_2: R1.2 RV1.1 SW1.2 U1.2 | length 81.9
  Top Layer w0.254: U1.2 110.261,21.566 110.261,6.974 SW1.2 116.111,3.226 119.069,3.226 121.818,5.975 121.818,30.148 R1.2
  Bottom Layer w0.254: R1.2 126.47,32.36 130.531,32.36 132.563,34.392 141.323,34.392 RV1.1
NetR6_1: R6.1 RV5.1 | length 48.3
  Bottom Layer w0.254: RV5.1 35.066,7.366 42.332,7.366 53.768,18.802 74.101,18.802 R6.1
NetR6_2: R6.2 RV7.2 RV7.3 | length 48.6
  Top Layer w0.254: RV7.3 51.912,46.787 64.541,46.787 65.786,45.542 65.786,27.28 67.056,26.01 74.871,26.01 R6.2
  Bottom Layer w0.254: RV7.2 RV7.3
NetR7_1: R7.1 RV5.2 | length 59.9
  Top Layer w0.254: RV5.2 40.636,4.064 44.272,4.064 45.06,4.851 45.06,27.635 v1(47,29.575) v1@47.281,29.575
  Bottom Layer w0.254: v1(47,29.575) 47.644,28.931 67.435,28.931 R7.1
NetR9_1: R9.1 RV6.1 | length 56.9
  Top Layer w0.254: RV6.1 52.477,4.623 62.001,4.623 63.805,6.426 63.805,18.644 61.112,21.336 61.112,24.155 61.849,24.892 75.54,24.892 77.064,26.416 77.064,31.995 R9.1
NetR9_2: R9.2 RV8.2 RV8.3 | length 15.3
  Bottom Layer w0.254: RV8.2 RV8.3 73.993,45.225 R9.2
NetR11_2: R11.2 R12.2 U2.6 | length 60.1
  Top Layer w0.254: U2.6 56.007,21.794 v1(56.007,44.45)
  Bottom Layer w0.254: v1(56.007,44.45) 57.912,46.355 81.588,46.355 R11.2 R12.2
NetROS_1: ROS.1 RV1.2 RV1.3 U1.1 | length 38.3
  Top Layer w0.254: RV1.3 144.272,26.407 144.272,28.903 RV1.2
  Bottom Layer w0.254: U1.1 112.673,26.518 127.002,26.518 ROS.1 141.435,23.57 RV1.3
NetRV2_2: RV2.2 RV2.3 SW1.1 | length 44.8
  Top Layer w0.254: SW1.1 112.244,0.991 120.625,0.991 123.85,4.216 123.85,13.185 RV2.3 RV2.2
NetRV3_2: RV3.2 RV3.3 SW1.3 | length 27.8
  Top Layer w0.254: RV3.3 RV3.2
  Bottom Layer w0.254: SW1.3 118.111,3.226 119.548,3.226 120.629,2.144 126.344,2.144 RV3.3
NetRV4_2: RV4.2 RV4.3 SW1.4 | length 32.7
  Top Layer w0.254: RV4.3 RV4.2
  Bottom Layer w0.254: SW1.4 119.599,1.636 133.351,1.636 RV4.3
NetRV9_2: RV9.2 U2.5 | length 44.3
  Bottom Layer w0.254: U2.5 63.838,8.179 91.721,8.179 RV9.2
NetU1_6: U1.6 U1.7 | length 2.5
  Top Layer w0.254: U1.6 U1.7
pads on no net: C2.0 C3.0 C4.0 C5.0 C6.0 C7.0 CF1.0 CF2.0 CF3.0 CF4.0 CF7.0 CF8.0 JI.2 JI.None

## Polygon pours and split planes (outlines as drawn)
GND on Bottom Layer "Bottom Layer-GND" (solid, remove dead copper, pour order 2): 20,0.05 19.95,0.05 0,20 0,30 20,50 130,50 150,30 150,20 130,0
GND on Bottom Layer "Bottom Layer-GND 1" (solid, pour order 0): 0,0

## Silkscreen, mask and mechanical layers (free items; w line width, h text height)
Top Overlay:
  text "(BASS)" at 36.775,13.1 h1.52
  text "(TREBEL)" at 54.789,13.1 h1.52
  text "(VOLUME)" at 91.814,13.1 h1.52
  text "(SRC SENS.)" at 108.95,7.475 h1.52
  text "Circuitos 2" at 124.65,2 h1
  text "Diego Luna" at 125.3,0.525 h1
Mechanical 3:
  the board outline again, w0.1

## Text inside footprints (layer, text, board x,y; h text height)
C1: Top Overlay "+" at 96.788,44.275 h1.5 r270
C8: Top Overlay "+" at 96.788,34.115 h1.5 r270
CAI: Top Overlay "+" at 96.888,23.955 h1.5 r270
CF5: Top Overlay "+" at 21.763,40.475 h1.5 r270
CF6: Top Overlay "+" at 21.763,25.125 h1.5 r270
CF9: Top Overlay "+" at 41.413,39.108 h1.5 r270
CF10: Top Overlay "+" at 41.413,22.953 h1.5 r270
JI: Mechanical 4 "PCB edge" at 68.777,2.608 h1.88
JO: Mechanical 4 "PCB EDGE" at 135.1,48.57 h1.88 r180; Mechanical 4 "PCB EDGE" at 135.1,48.57 h1.88 r180
?: Top Overlay "FIUBA" at 125.444,3.569 h1.8